# Altium PCB BRD220522.pcbdoc
Units mm, origin at the board's own origin, x right, y up, seen from the top; angles counter-clockwise.
Board outline 129.01 x 102.76 mm, 2 copper layers (Top Layer, Bottom Layer); 85 components, 54 nets, 259 pads, 128 vias.
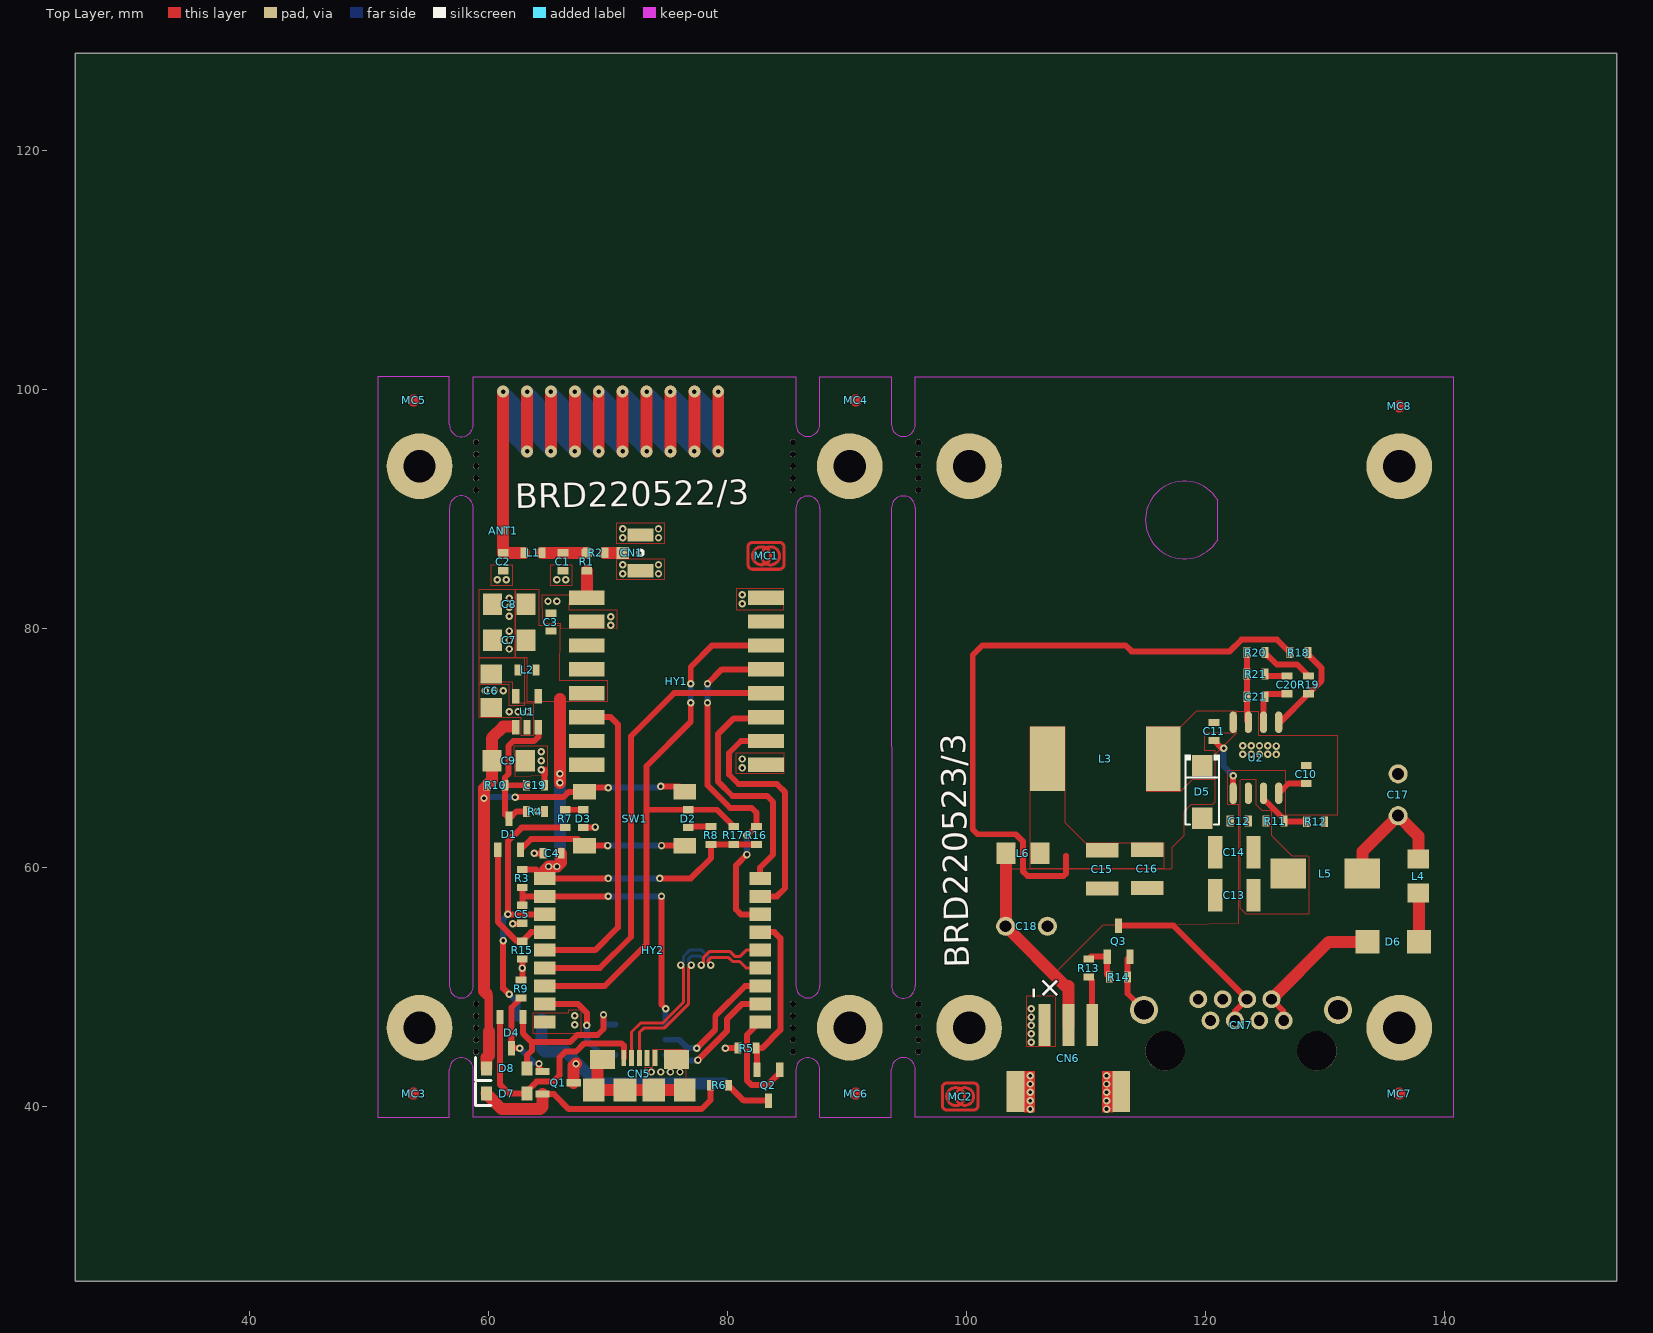
[diagram p0: Top Layer view]
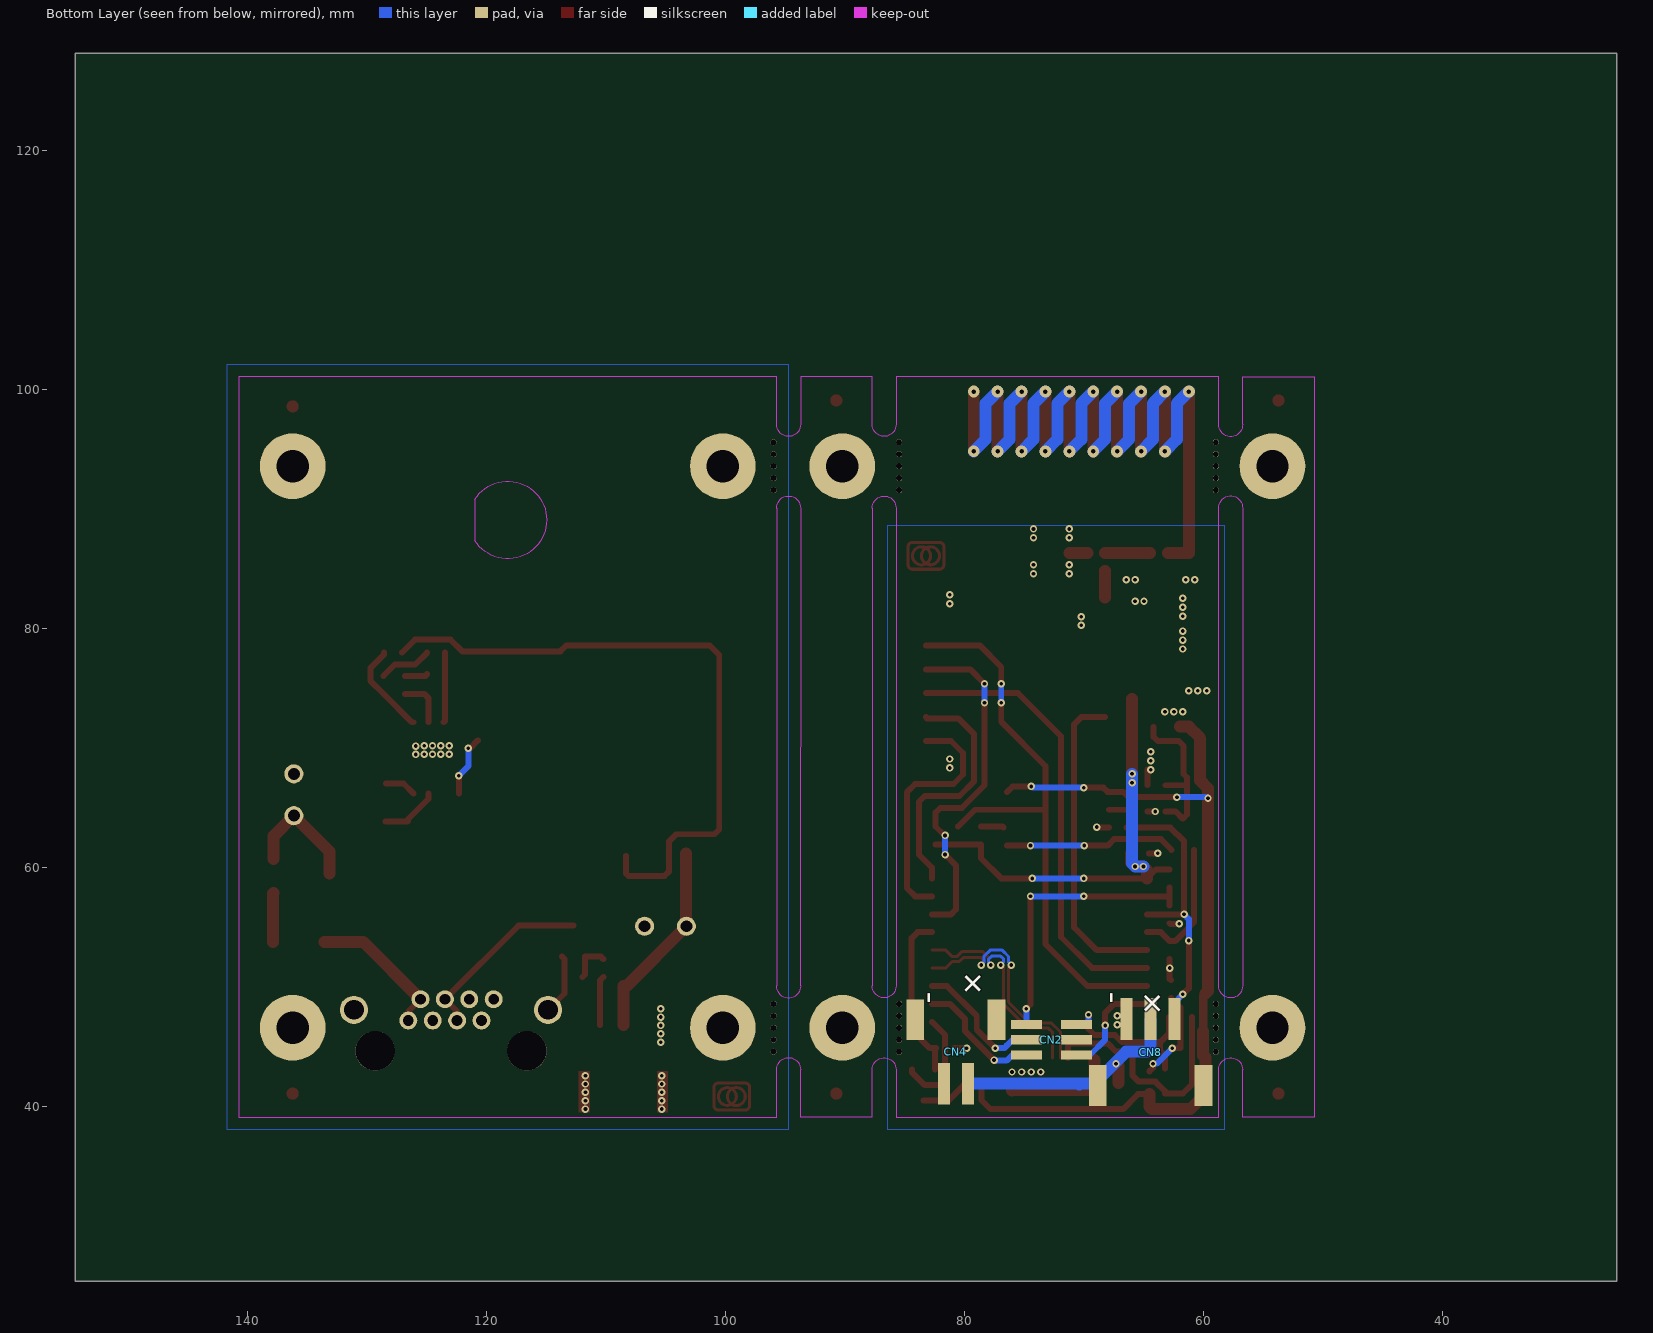
[diagram p1: Bottom Layer view, seen from below]

## Layer stack, top to bottom
Top Layer: signal copper (thickness not stored)
Dielectric: dielectric 0.32, FR-4, Dk 4.8
Bottom Layer: signal copper (thickness not stored)

## Board outline
154.414,25.4 25.4,25.4 25.4,128.164 154.414,128.164

## Components (designator, comment, footprint, x,y, rotation, side; value= is the part's Value field where it differs from the comment)
ANT1 "DN038" ANT_DN038 70.214,94.599 r0 top
C1 "100p" CA_0603 66.214,85.6 r270 top
C2 "100p" CA_0603 61.214,85.6 r270 top
C3 "100n" CA_0603 65.214,80.55 r90 top
C4 "100n" CA_0603 65.314,61.2 r180 top
C5 "100n" CA_0603 62.814,56.1 r270 top
C6 "10U/6V3" CA_1206 60.214,74.8 r270 top
C7 "10U/6V3" CA_1206 61.714,79.05 r180 top
C8 "10U/6V3" CA_1206 61.714,82.05 r180 top
C9 "10U/6V3" CA_1206 61.664,68.95 r0 top
C10 "10n" CA_0603 128.415,67.8 r90 top
C11 "100n" CA_0603 120.714,71.4 r90 top
C12 "10n" CA_0603 122.814,63.9 r180 top
C13 "10µ" CA_1210 122.414,57.7 r180 top
C14 "10µ" CA_1210 122.414,61.3 r180 top
C15 "47µ" CA_1210 111.359,59.856 r270 top
C16 "47µ" CA_1210 115.114,59.9 r270 top
C17 "100uF" CA_D8.0_P3.5 136.114,66.1 r90 top
C18 "100u" CA_D8.0_P3.5 105.014,55.1 r0 top
C19 "100n" CA_0603 63.914,66.9 r0 top
C20 "220p" CA_0603 126.814,75.3 r90 top
C21 "15p" CA_0603 124.214,74.3 r180 top
CN1 "U.FL" CN_ANT-SMD_UFL-R-SMT-1 71.964,86.351 r90 top
CN2 "20021521" CN_HDR_2X3_180D_P127_SMD 72.714,45.6 r0 bottom
CN4 "S2B-PH" CN_HDR_1X2_90D_P20_JST_S2B-PH-SM4-TB 80.714,44.6 r180 bottom
CN5 "10118192-0002LF" CN_USB_MICRO_B_AMPHENOL_10118192-0002LF 72.614,41.4 r0 top
CN6 "S3B-PH" CN_HDR_1X3_90D_P25_JST_PH_S3B#1 108.514,44.1 r0 top
CN7 "X12ADGWA3DY1027" CN_MODJACK_8C8P_RA_NO_LED 122.964,48.1 r0 top
CN8 "S3B-PH" CN_HDR_1X3_90D_P25_JST_PH_S3B#2 64.414,44.6 r0 bottom
D1 "BAT54C" SC_SOT23-3 61.714,62.8 r0 top
D2 "GREEN" DI_LED_GREEN_0603 76.714,64.1 r270 top
D3 "RED" DI_LED_RED_0603 67.914,64.1 r90 top
D4 "BAT54C" SC_SOT23-3 61.914,46.2 r180 top
D5 "SS24A" SMA_L4.4-W2.6-LS5.0-RD 119.714,66.35 r270 top
D6 "B340A" DI_DO-214AC_SMA 135.714,53.8 r180 top
D7 "B5819W" DI_SOD123W 61.514,41.1 r0 top
D8 "B5819W" DI_SOD123W 61.514,43.2 r0 top
HY1 "RFM69HCW-868S2" HY_RFM69HCW 75.714,75.601 r180 top
HY2 "ESP-C3-13U-4M" HY_WIRELM-SMD_ESP-C3-13U-2M 73.714,53.1 r0 top
L1 "L_unknown" CL_0603 63.714,86.35 r180 top
L2 "L_unknown" CL_0603 63.214,76.55 r0 top
L3 "744771118" CL_STD1212 111.614,69.1 r180 top
L4 "120E/100MHz" CL_1206 137.814,59.3 r90 top
L5 "10U" CL_STD6050 130.014,59.5 r180 top
L6 "120E/100MHz" CL_1206 104.714,61.2 r180 top
MC1 "LIEBTRAU_LOGO" MC_LIEBTRAU_LOGO 83.214,86.1 r180 top
MC2 "LIEBTRAU_LOGO" MC_LIEBTRAU_LOGO 99.464,40.85 r0 top
MC3 "MC_FIDUCIAL" MC_FIDUCIAL 53.714,41.1 r0 top
MC4 "MC_FIDUCIAL" MC_FIDUCIAL 90.714,99.1 r0 top
MC5 "MC_FIDUCIAL" MC_FIDUCIAL 53.714,99.1 r0 top
MC6 "MC_FIDUCIAL" MC_FIDUCIAL 90.714,41.1 r0 top
MC7 "MC_FIDUCIAL" MC_FIDUCIAL 136.214,41.1 r0 top
MC8 "MC_FIDUCIAL" MC_FIDUCIAL 136.214,98.6 r0 top
Q1 "SI3401A" SC_SOT23-3 65.814,42 r270 top
Q2 "NXV55UNR" SC_SOT23-3 83.414,41.8 r180 top
Q3 "BC846B" SC_SOT23-3 112.714,53.85 r0 top
R1 "0E" RE_0603 68.214,85.6 r90 top
R2 "0E" RE_0603 68.964,86.35 r0 top
R3 "10K" RE_0603 62.814,59.1 r90 top
R4 "100K" RE_0603 63.914,64.7 r180 top
R5 "3K3" RE_0603 81.614,44.9 r0 top
R6 "10K" RE_0603 79.314,41.8 r0 top
R7 "10K" RE_0603 66.414,64.1 r270 top
R8 "10K" RE_0603 78.614,62.7 r90 top
R9 "100K" RE_0603 62.714,49.85 r270 top
R10 "0E" RE_0603 60.614,66.9 r0 top
R11 "680K" RE_0603 125.814,63.9 r180 top
R12 "47K" RE_0603 129.214,63.85 r180 top
R13 "1K8" RE_0603 110.214,51.6 r270 top
R14 "10K" RE_0603 112.714,50.85 r180 top
R15 "10K" RE_0603 62.814,53.1 r270 top
R16 "10K" RE_0603 82.414,62.7 r270 top
R17 "10K" RE_0603 80.514,62.7 r270 top
R18 "10K" RE_0603 127.814,78 r180 top
R19 "1K8" RE_0603 128.614,75.3 r90 top
R20 "100E" RE_0603 124.214,78 r180 top
R21 "100K" RE_0603 124.214,76.2 r0 top
SW1 "PTS645" SW_MOM_6X6 72.215,64.1 r0 top
U1 "RT9080-33GJ5" SC_SOT23-5 63.214,73.05 r90 top
U2 "TPS54231D" SC_SO08_150MIL_BODY 124.214,69.2 r90 top
? "" ? 95.714,108.506 r0 top
? "" ? 44.308,70.1 r0 top
? "" ? 72.214,101.049 r0 top
? "" ? 50.597,70.1 r0 top
? "" ? 118.214,101.067 r0 top

## Footprints (in the part's own frame and the unit in brackets; to place one, negate y for a bottom-side part, rotate by r counter-clockwise, add the part's x,y. Pads: shape width x height; smd on the part's side, far side on the other; paste and mask are expansions set on the pad)
ANT_DN038 [mil]
  rect 10x20 smd: 1(-354.42,-252.03)
  Top Layer lines w39.37: -354.34,-226.46 -354.34,206.74 ; -275.58,9.84 -275.57,206.68 ; -196.85,9.84 -196.85,206.64 ; -118.15,9.84 -118.15,206.64 ; -39.36,9.84 -39.36,206.67 ; 39.38,9.84 39.38,206.68 ; 118.12,9.84 118.12,206.68 ; 196.85,9.84 196.86,206.67 ; 275.55,9.84 275.65,206.64 ; 354.33,9.84 354.34,206.68
  Bottom Layer lines w39.37: -354.33,206.69 -314.96,167.32 -314.96,49.21 -275.59,9.84 ; -275.57,206.68 -236.2,167.31 -236.2,49.2 -196.84,9.83 ; -196.84,206.68 -157.47,167.31 -157.47,49.2 -118.1,9.83 ; -118.11,206.68 -78.73,167.31 -78.73,49.2 -39.36,9.83 ; -39.36,206.68 0.01,167.31 0.01,49.2 39.38,9.83 ; 39.38,206.68 78.75,167.31 78.75,49.2 118.12,9.83 ; 118.12,206.68 157.49,167.31 157.49,49.2 196.86,9.83 ; 196.85,206.68 236.23,167.31 236.23,49.2 275.6,9.84 ; 275.6,206.67 314.97,167.3 314.97,49.19 354.34,9.82
CA_0603 [mm]
  rect 0.6x0.9 smd: 1(-0.75,0) 2(0.75,0)
CA_1206 [mil]
  rect 63x70.9 smd: 1(-55,0) 2(55,0)
CA_1210 [mm]
  rect 1.2x2.7 smd: 1(-1.6,0) 2(1.6,0)
CA_D8.0_P3.5 [mm]
  round 1.6 hole 1: 1(-1.75,0) 2(1.75,0)
CL_0603 [mm]
  rect 0.6x0.9 smd: 1(-0.75,0) 2(0.75,0)
CL_1206 [mil]
  rect 63x71 smd: 1(-56,0) 2(56,0)
CL_STD1212 [mm]
  rect 2.9x5.4 smd: 1(-4.85,0) 2(4.85,0)
CL_STD6050 [mm]
  rect 3x2.5 smd: 1(-3.1,0) 2(3.1,0)
CN_ANT-SMD_UFL-R-SMT-1 [mm]
  rect 1x1.05 smd: 1(0,0.75)
  rect 1.1x2.2 smd: 2(-1.5,-0.75) 2(1.5,-0.75)
  silkscreen extent -0.22,-0.97 0.22,-0.53
CN_HDR_1X2_90D_P20_JST_S2B-PH-SM4-TB [mm]
  rect 1.5x3.4 smd: 0(-3.4,2.675) 0(3.4,2.675)
  rect 1x3.5 smd: 1(1,-2.675) 2(-1,-2.675)
CN_HDR_1X3_90D_P25_JST_PH_S3B#1 [mm]
  rect 1.5x3.4 smd: 0(-4.425,-2.825) 0(4.425,-2.825)
  rect 1x3.5 smd: 1(-2,2.725) 2(0,2.725) 3(2,2.725)
CN_HDR_1X3_90D_P25_JST_PH_S3B#2 [mm]
  rect 1.5x3.4 smd: 0(-4.425,2.825) 0(4.425,2.825)
  rect 1x3.5 smd: 1(2,-2.725) 2(0,-2.725) 3(-2,-2.725)
CN_HDR_2X3_180D_P127_SMD [mm]
  rect 2.6x0.76 smd: 1(2.1,-1.27) 2(-2.1,-1.27) 3(2.1,0) 4(-2.1,0) 5(2.1,1.27) 6(-2.1,1.27)
CN_MODJACK_8C8P_RA_NO_LED [mm]
  round 1.5 hole 0.9: 1(3.57,-0.89) 2(2.55,0.89) 3(1.53,-0.89) 4(0.51,0.89) 5(-0.51,-0.89) 6(-1.53,0.89) 7(-2.55,-0.89) 8(-3.57,0.89)
  round 2.35 hole 1.65: S(-8.125,0) S(8.125,0)
  round 3.3 hole 3.3 unplated: ""(-6.35,-3.43) ""(6.35,-3.43)
CN_USB_MICRO_B_AMPHENOL_10118192-0002LF [mm]
  rect 0.4x1.35 smd: 1(-1.3,2.68) 2(-0.65,2.68) 3(0.002,2.679) 4(0.65,2.68) 5(1.3,2.68)
  rect 1.8x1.9 smd: S(-3.8,0) S(3.8,0)
  rect 2.1x1.6 smd: S(-3.1,2.55) S(3.1,2.55)
  rect 1.9x1.9 smd: S(-1.2,0) S(1.2,0)
DI_DO-214AC_SMA [mm]
  rect 2x2 smd: 1(-2.15,0) 2(2.15,0)
DI_LED_GREEN_0603 [mm]
  rect 0.6x0.9 smd: 1(-0.75,0) 2(0.75,0)
DI_LED_RED_0603 [mm]
  rect 0.6x0.9 smd: 1(-0.75,0) 2(0.75,0)
DI_SOD123W [mm]
  rect 0.9x1.2 smd: 1(-1.7,0) 2(1.7,0)
  silkscreen extent -2.6,-1 -1.3,0.9
HY_RFM69HCW [mm]
  rect 3x1.2 smd: 1(-7.5,7) 2(-7.5,5) 3(-7.5,3) 4(-7.5,1) 5(-7.5,-1) 6(-7.5,-3) 7(-7.5,-5) 8(-7.5,-7) 9(7.5,-7) 10(7.5,-5) 11(7.5,-3) 12(7.5,-1) 13(7.5,1) 14(7.5,3) 15(7.5,5) 16(7.5,7)
HY_WIRELM-SMD_ESP-C3-13U-2M [mm]
  rect 1.8x1.1 smd: 1(-9,6) 2(-9,4.5) 3(-9,3) 4(-9,1.5) 5(-9,0) 6(-9,-1.5) 7(-9,-3) 8(-9,-4.5) 9(-9,-6) 10(9,-6) 11(9,-4.5) 12(9,-3) 13(9,-1.5) 14(9,0) 15(9,1.5) 16(9,3) 17(9,4.5) 18(9,6)
MC_FIDUCIAL [mm]
  Top Layer lines w0.5: -0.254,0 cw(c0,0) 0.254,0 cw(c0,0) -0.254,0
MC_LIEBTRAU_LOGO [mm]
  Top Layer lines w0.254: 1.5,0.75 ccw(c1.127,0.751) 1.125,1.125 -1.125,1.125 ccw(c-1.125,0.75) -1.5,0.75 -1.5,-0.75 ccw(c-1.125,-0.75) -1.125,-1.125 1.125,-1.125 ccw(c1.125,-0.75) 1.5,-0.75 1.5,0.75 ; 1.125,0 ccw(c0.375,0) -0.375,0 ccw(c0.375,0) 1.125,0 ; 0.375,0 ccw(c-0.375,0.004) -1.125,0 ccw(c-0.375,-0.004) 0.375,0
RE_0603 [mm]
  rect 0.6x0.9 smd: 1(-0.75,0) 2(0.75,0)
SC_SO08_150MIL_BODY [mm]
  oval 1.8x0.6 smd: 1(-2.972,1.905) 2(-2.972,0.635) 3(-2.972,-0.635) 4(-2.972,-1.905) 5(2.972,-1.905) 6(2.972,-0.635) 7(2.972,0.635) 8(2.972,1.905)
SC_SOT23-3 [mm]
  rect 0.6x1.2 smd: 1(-0.95,-1.3) 2(0.95,-1.3) 3(0,1.3)
SC_SOT23-5 [mil]
  rect 47.2x23.6 smd: 1(-51,37) 2(-51,0) 3(-51,-37) 4(51,-37) 5(51,37)
SMA_L4.4-W2.6-LS5.0-RD [mm]
  rect 1.8x1.7 smd: 1(-2.192,0) 2(2.192,0)
  silkscreen extent -3.11,-1.48 2.73,1.48
SW_MOM_6X6 [mm]
  rect 1.9x1.3 smd: 1(-4.2,2.25) 2(4.2,2.25) 3(-4.2,-2.25) 4(4.2,-2.25)
? [mm]

## Free pads (board coordinates)
  round 5.5 hole 2.7: 1(54.214,46.6) 1(54.214,93.6) 1(90.214,46.6) 1(90.214,93.6) 1(100.214,93.6) 1(100.214,46.6) 1(136.214,93.6) 1(136.214,46.6)
  round 0.5 hole 0.5 unplated: ""(58.963,91.6) ""(58.963,92.6) ""(58.963,93.6) ""(58.963,94.6) ""(58.963,95.6) ""(58.964,44.601) ""(58.964,45.601) ""(58.964,46.601) ""(58.964,47.601) ""(58.964,48.601) ""(85.464,44.602) ""(85.464,45.602) ""(85.464,46.602) ""(85.464,47.602) ""(85.464,48.602) ""(85.464,91.6) ""(85.464,92.6) ""(85.464,93.6) ""(85.464,94.6) ""(85.464,95.6) ""(95.964,44.6) ""(95.964,45.6) ""(95.964,46.6) ""(95.964,47.6) ""(95.964,48.6) ""(95.964,91.6) ""(95.964,92.6) ""(95.964,93.6) ""(95.964,94.6) ""(95.964,95.6)

## Via types
v1: diameter 0.62, hole 0.31, Top Layer to Bottom Layer, tented both sides, 109 vias
v2: diameter 1, hole 0.38, Top Layer to Bottom Layer, tented both sides, 19 vias

## Nets (pads, with @x,y where several pads share a name; then routed paths per layer and width w, separated by ;. In a path a pad name is that pad's centre, name@x,y a point inside that pad or via, vN(x,y) a via of type N, cw(c..) or ccw(c..) an arc to the next point about the centre after c; other vN are vias at no path point)
+3V3: C3.1 C4.1 C7.1 C8.1 HY1.13 HY2.1 L2.2 R3.2 R8.1 R16.2 R17.2 | length 40.2
  Top Layer w0.5: R3.2 63.964,59.85 HY2.1 66.214,59.1 v1(70.014,59.1) ; v1(74.314,59.1) 76.915,59.101 78.614,60.8 R8.1 ; R8.1@78.765,61.951 R17.2 ; R17.2 R16.2
  Top Layer w1: HY2.1 64.714,59.8 v1(65.014,60.1) v1(65.714,60.1) 66.064,60.45 C4.1 ; v1(65.964,67.1) v1(65.964,67.85) 65.964,74.1
  Bottom Layer w0.5: v1(70.014,59.1) v1(74.314,59.1)
  Bottom Layer w1: v1(65.014,60.1) v1(65.714,60.1) 65.964,60.35 v1(65.964,67.85)
+5V: C18.1 CN6.2 L6.2 | length 16.7
  Top Layer w1: L6.2 103.292,55.127 C18.1 108.265,50.099 108.514,50.099 CN6.2
/CS: HY1.5 HY2.16 R16.1 | length 29.9
  Top Layer w0.5: v1(78.314,75.4) 79.515,76.601 HY1.5@83.214,76.601 ; v1@78.316,73.8 78.316,66.899 80.216,64.999 82.014,64.999 82.415,64.6 R16.1 ; v1(81.614,61.1) 80.714,60.2 80.714,56.5 81.114,56.1 HY2.16 ; v1(81.614,62.7) 81.664,62.7 R16.1
  Bottom Layer w0.5: v1(78.314,73.8) v1(78.314,75.4) ; v1(81.614,61.1) v1(81.614,62.7)
ADC: HY2.15 Q2.2 R5.2 | length 14.1
  Top Layer w0.5: Q2.2 82.465,44.8 R5.2 82.885,44.9 84.414,46.429 84.414,54.1 83.916,54.6 HY2.15
ANT1_1: ANT1.1 C2.1 L1.2 | length 15.2
  Top Layer w1: 61.214,99.85 C2.1 L1.2
C1_1: C1.1 L1.1 R1.2 R2.1 | length 3.8
  Top Layer w1: L1.1 R1.2
C11_1: C11.1 U2.1 | length 5.2
  Top Layer w0.5: C11.1 121.364,70 v1(121.514,70) ; U2.1 122.309,67.695 v1(122.314,67.7)
  Bottom Layer w0.5: v1(121.514,70) 121.514,68.5 v1(122.314,67.7)
C20_1: C20.1 C21.1 U2.6 | length 4.1
  Top Layer w0.5: U2.6 124.849,74.185 C21.1 125.214,74.55 C20.1
CN2_2: CN2.2 D4.1 D8.2 | length 14.2
  Top Layer w0.5: D4.1 62.864,46.15 63.614,45.4 ; D8.2 63.215,44.3 63.614,44.699 63.614,45.4 ; v1(69.614,47.7) 69.614,46.501 69.113,46 67.414,46 66.815,45.4 63.614,45.4
  Bottom Layer w0.5: v1@69.614,47.699 69.614,47 69.746,46.871 CN2.2
CN6_3: CN6.3 R13.2 | length 4.1
  Top Layer w0.5: R13.2@110.215,50.85 110.514,50.55 CN6.3
CN7_1: CN7.1 CN7.2 D6.2 | length 12.2
  Top Layer w0.5: CN7.2 126.534,47.97 CN7.1
  Top Layer w1: CN7.2 130.324,53.8 D6.2
D1_2: D1.2 SW1.3 SW1.4 | length 14.4
  Top Layer w0.5: D1.2@62.664,61.5 63.565,62.4 67.465,62.4 SW1.3 v1(69.964,61.85) ; v1(74.465,61.85) SW1.4
  Bottom Layer w0.5: v1(69.964,61.85) v1(74.465,61.85)
D1_3: C19.1 D1.3 R4.2 R10.2 U1.3 | length 13.5
  Top Layer w0.5: R4.2 62.314,64.7 D1.3 61.365,64.45 R10.2 ; C19.1 R10.2 ; U1.3 64.154,70.939 63.815,70.6 62.065,70.6 61.663,70.198 61.663,67.849 61.365,67.55 R10.2@61.365,66.9
D2_2: D2.2 R8.2 | length 1.9
  Top Layer w0.5: D2.2 76.815,63.45 R8.2
D3_2: D3.2 R7.1 | length 1.5
  Top Layer w0.5: R7.1 D3.2
DIO0: HY1.14 HY2.5 | length 26.7
  Top Layer w0.5: HY2.5@64.714,53.099 68.915,53.099 70.815,54.999 70.815,71.999 70.214,72.601 HY1.14
EN_PWR: D1.1 HY2.4 R15.1 | length 11
  Top Layer w0.5: D1.1@60.764,61.499 60.764,55.451 62.364,53.851 R15.1 63.564,54.6 HY2.4
GND: C1.2 C2.2 C3.2 C4.2 C5.2 C6.2 C7.2 C8.2 C9.2 C10.2 C12.2 C13.2 C14.2 C15.2 C16.2 C17.2 C18.2 C19.2 C21.2 CN1.2 CN2.4 CN4.0 CN4.2 CN5.5 CN5.S CN6.0 CN6.1 CN7.3 CN7.6 CN7.S CN8.1 D3.1 D5.2 HY1.1 HY1.8 HY1.10 HY2.9 pad.1 Q3.2 R4.1 R5.1 R9.1 R12.1 R14.1 R15.2 R20.2 R21.1 U1.2 U2.7 | length 28.6
  Top Layer w0.5: v1(62.014,55.3) 62.765,55.3 C5.2 ; R9.1 62.815,50.7 v1(62.815,51.6) R15.2 ; v1(63.815,61.2) C4.2 ; v1(64.014,64.7) R4.1 ; v1(64.415,68.2) 64.663,68.199 C19.2@64.663,66.899 ; D3.1 68.864,63.35 v1(68.914,63.4) ; v1(79.815,44.9) R5.1 ; Q3.2 113.464,52.35 R14.1 113.464,49.475 CN7.S@114.839,48.1 ; R20.2 123.464,72.287 U2.7
  Top Layer w1: CN5.S@69.114,43.9 69.114,41.4 68.815,41.4 75.964,41.4 CN5.S@76.014,41.35
  other v1: 105.314,39.8 111.714,39.8 105.314,40.5 111.714,40.5 105.314,41.2 111.714,41.2 105.314,41.9 111.714,41.9 105.314,42.6 111.714,42.6 73.614,42.9 74.414,42.9 75.215,42.9 76.014,42.9 105.414,45.4 105.414,46.1 105.414,46.8 67.215,46.85 105.414,47.5 67.215,47.6 105.414,48.2 81.215,68.35 64.415,68.95 81.215,69.1 125.902,69.479 123.114,69.5 123.814,69.5 124.514,69.5 125.214,69.5 64.415,69.7 125.902,70.179 123.114,70.2 123.814,70.2 124.514,70.2 125.214,70.2 61.714,73.05 62.465,73.05 63.215,73.05 59.714,74.8 60.465,74.8 61.214,74.8 61.714,78.3 61.714,79.05 61.714,79.8 70.214,80.3 70.214,81 61.714,81.05 61.714,81.8 81.215,82.1 64.964,82.3 65.714,82.3 61.714,82.55 81.215,82.85 60.714,84.1 61.465,84.1 65.714,84.1 66.465,84.1 71.214,84.6 74.215,84.6 71.214,85.35 74.215,85.35 71.214,87.6 74.215,87.6 71.214,88.35 74.215,88.35
HY1_9: HY1.9 R1.1 | length 2.2
  Top Layer w1: HY1.9 R1.1
HY2_3: CN8.3 HY2.3 R7.2 | length 23.9
  Top Layer w0.5: v1(61.214,53.9) 61.214,49.9 v1(61.714,49.4) ; HY2.3@64.714,56.099 61.616,56.099 v1(61.614,56.1) 61.614,62.2 62.764,63.35 R7.2
  Bottom Layer w0.5: v1(61.214,53.9) 61.214,55.7 v1(61.614,56.1) ; v1(61.714,49.4) 62.414,48.7 CN8.3
HY2_10: HY2.10 Q2.1 | length 9
  Top Layer w0.5: HY2.10 81.614,46 81.614,42.2 82.014,41.8 83.314,41.8 84.364,42.85 Q2.1
IO9: CN2.6 HY2.8 | length 9
  Top Layer w0.5: HY2.8 67.465,48.6 68.215,47.85 v1(68.215,46.8)
  Bottom Layer w0.5: v1(68.215,46.8) 68.215,45.6 69.485,44.33 CN2.6
L2_1: C6.1 L2.1 U1.5
L4_1: D6.1 L4.1 | length 4.1
  Top Layer w1: L4.1 137.864,57.827 D6.1
L4_2: C17.1 L4.2 L5.1 | length 10.4
  Top Layer w1: L5.1 133.114,61.35 C17.1 137.814,62.65 L4.2
L6_1: C15.1 C16.1 L3.2 L6.1 R18.2 | length 55
  Top Layer w0.5: 104.714,61.199 104.714,62.2 104.114,62.799 100.917,62.799 100.515,63.201 100.515,77.8 101.315,78.6 113.314,78.6 113.814,78.1 122.014,78.1 123.014,79.1 125.964,79.1 R18.2 ; 104.714,61.2 104.714,59.7 105.114,59.3 108.114,59.3 108.314,59.5 108.314,61
MISO: HY1.2 HY2.17 | length 21
  Top Layer w0.5: HY2.17 84.114,57.6 84.814,58.3 84.814,66.3 84.114,67 80.914,67 80.114,67.8 80.114,69.6 81.115,70.601 HY1.2@83.214,70.601
MOSI: HY1.3 HY2.18 | length 20.7
  Top Layer w0.5: HY2.18 82.715,60 83.815,61.1 83.815,65.499 83.314,66 80.414,66 79.215,67.201 79.215,71.199 80.515,72.499 83.113,72.499 HY1.3@83.214,72.601
NULL: 
Q1_1: D4.3 Q1.1 R9.2 | length 8.1
  Top Layer w0.5: v1(62.614,44.9) D4.3 61.914,48.3 R9.2 ; v1(64.215,43.6) 64.215,43.25 Q1.1
  Bottom Layer w0.5: v1(62.614,44.9) 63.915,43.6 v1(64.215,43.6)
Q2_3: Q2.3 R6.2 | length 3.9
  Top Layer w0.5: R6.2 81.364,40.5 Q2.3
Q3_1: Q3.1 R13.1 R14.2 | length 3.4
  Top Layer w0.5: R13.1@110.214,52.35 110.414,52.55 Q3.1 111.764,51.05 R14.2
Q3_3: CN7.4 CN7.5 Q3.3 | length 15.5
  Top Layer w0.5: Q3.3 117.314,55.15 CN7.4 122.454,47.97 CN7.5
R2_2: CN1.1 R2.2 | length 1.5
  Top Layer w1: R2.2 CN1.1
R11_1: R11.1 R12.2 U2.3 | length 5
  Top Layer w0.5: U2.3 124.849,65.765 126.564,64.05 R11.1 126.614,63.85 R12.2@128.464,63.85
R18_1: R18.1 R19.1 U2.5 | length 7.9
  Top Layer w0.5: U2.5 126.236,72.172 R19.1 129.714,75.65 129.714,76.7 128.564,77.85 R18.1
R20_1: R19.2 R20.1 | length 4.5
  Top Layer w0.5: R20.1 125.964,77 127.664,77 R19.2
R21_2: C20.2 R21.2 | length 1.9
  Top Layer w0.5: R21.2 125.114,76.05 C20.2
RST: C5.1 CN2.1 HY2.2 R3.1 | length 24
  Top Layer w0.5: C5.1 R3.1 ; 62.815,57.6 HY2.2 v1(70.014,57.6) ; v1(74.465,57.6) 74.465,48.55 v1(74.815,48.2)
  Bottom Layer w0.5: v1(70.014,57.6) v1(74.465,57.6) ; CN2.1 v1(74.815,48.2)
RST_RADIO: D2.1 HY1.6 HY2.7 R17.1 | length 49.6
  Top Layer w0.5: HY2.7 69.715,50.099 73.215,53.599 73.215,68.502 76.914,72.2 v1(76.914,73.8) ; 73.215,64.829 D2.1@76.715,64.849 ; D2.1 79.114,64.85 R17.1 ; v1(76.914,75.4) 76.914,76.8 78.714,78.601 HY1.6@83.215,78.601
  Bottom Layer w0.5: v1(76.914,73.8) v1(76.914,75.4)
RXD: CN2.5 HY2.11 | length 10.7
  Top Layer w0.5: v1@77.516,43.899 79.964,46.35 79.964,47.351 81.214,48.601 HY2.11
  Bottom Layer w0.5: CN2.5 75.985,44.33 76.464,43.85 77.464,43.85 v1(77.515,43.9)
S$33489: 
S$94106: 
S$94396: 
SCK: HY1.4 HY2.6 | length 37.9
  Top Layer w0.5: HY2.6 69.314,51.6 71.915,54.199 71.915,71.001 75.517,74.6 HY1.4@83.215,74.6
SW: C11.2 D5.1 L3.1 U2.8
TXD: CN2.3 HY2.12 | length 11
  Top Layer w0.5: v1(77.414,44.9) 78.964,46.45 78.964,47.6 81.464,50.1 HY2.12
  Bottom Layer w0.5: CN2.3 75.965,45.6 76.464,45.1 76.664,44.9 v1(77.414,44.9)
U2_4: C10.1 U2.4 | length 2.6
  Top Layer w0.5: U2.4 126.941,67.05 C10.1
USB_D+: CN5.3 HY2.14 | length 19.3
  Top Layer w0.254: CN5.3 72.616,46.202 73.015,46.6 74.737,46.599 76.715,48.578 76.715,51.6 v1(76.964,51.85) ; v1(77.787,51.85) 77.965,52.027 77.965,52.474 78.466,52.974 80.216,52.974 80.637,52.553 81.013,52.553 81.559,53.099 HY2.14@82.715,53.099
  Bottom Layer w0.254: v1(76.964,51.85) 76.715,52.1 76.715,52.35 76.964,52.6 77.715,52.6 77.964,52.35 77.964,52.028 v1(77.787,51.85)
USB_D-: CN5.2 HY2.13 | length 20.2
  Top Layer w0.254: CN5.2@71.965,44.08 71.965,46.25 72.72,47.006 74.568,47.006 76.308,48.746 76.308,51.631 v1(76.089,51.85) ; v1(78.589,51.85) 78.372,52.068 78.372,52.257 78.589,52.475 80.089,52.475 80.418,52.146 81.013,52.146 81.559,51.6 HY2.13
  Bottom Layer w0.254: v1(76.089,51.85) 76.308,52.069 76.308,52.569 76.84,53.1 77.839,53.1 78.37,52.569 78.37,52.069 v1(78.589,51.85)
VBAT: CN4.1 CN8.0 CN8.2 Q1.3 | length 20.7
  Top Layer w1: Q1.3 67.115,43.4 v1(67.314,43.6)
  Bottom Layer w1: CN8.2 64.415,44.9 64.714,44.6 66.464,44.6 69.139,41.925 70.388,41.925 ; 70.388,41.849 70.388,41.925 ; CN4.1 70.388,41.925
VCC: C9.1 D7.1 D8.1 Q1.2 R6.1 R10.1 SW1.1 SW1.2 U1.1 | length 70.3
  Top Layer w0.5: v1(62.214,65.9) 66.265,65.9 66.715,66.35 SW1.1 ; Q1.2 65.465,41.05 66.715,39.8 77.815,39.8 78.565,40.549 R6.1 ; SW1.1 68.364,66.7 v1(70.014,66.7) ; v1(74.414,66.8) 75.964,66.8 SW1.2
  Top Layer w0.7: 59.614,49.69 60.014,49.289 60.014,46.3
  Top Layer w1: D7.1 61.114,39.8 64.315,39.8 64.514,40 Q1.2 ; D8.1 59.814,44.1 60.014,44.3 60.014,46.3 ; 59.815,49.489 59.614,49.69 59.614,66.65 60.266,67.292 C9.1@60.266,68.949 ; C9.1 60.267,70.804 ; 60.317,70.904 61.214,71.801 61.966,71.801
  Bottom Layer w0.5: v1(59.614,65.8) 59.714,65.9 v1(62.214,65.9) ; v1(70.014,66.7) 74.314,66.7 v1(74.414,66.8)
VIN: C12.1 C13.1 C14.1 L5.2 R11.2 U2.2
VUSB: CN5.1 D4.2 D7.2 | length 20.1
  Top Layer w0.5: D4.2 60.965,41.85 61.714,41.1 D7.2 ; D7.2 63.215,41.301 64.015,42.101 65.415,42.101 65.915,42.601 65.915,44.1 66.416,44.6 67.315,44.6 68.015,45.3 71.114,45.3 71.314,45.1 CN5.1
pads on no net: CN5.4 CN7. CN7.7 CN7.8 HY1.7 HY1.11 HY1.12 HY1.15 HY1.16 U1.4
copper on no net:
  other v2: 63.215,94.849 65.215,94.849 67.215,94.849 69.215,94.849 71.215,94.849 73.215,94.849 75.215,94.849 77.215,94.849 79.215,94.849 61.215,99.849 63.215,99.849 65.215,99.849 67.215,99.849 69.215,99.849 71.215,99.849 73.215,99.849 75.215,99.849 77.215,99.849 79.215,99.849

## Polygon pours and split planes (outlines as drawn)
GND on Bottom Layer (solid): 58.214,88.6 86.464,88.6 86.464,38.1 58.214,38.1
GND on Bottom Layer (solid): 94.714,102.1 141.714,102.1 141.714,38.1 94.714,38.1
GND on Top Layer (solid): 80.714,69.6 84.714,69.6 84.714,67.85 80.714,67.85
GND on Top Layer (solid): 80.714,83.35 80.714,81.6 84.714,81.6 84.714,83.35 80.714,83.35
GND on Top Layer (solid): 66.739,82.85 66.714,81.6 70.714,81.6 70.739,79.95 66.014,80 66.014,80.4 64.514,80.4 64.489,82.85
GND on Top Layer (solid): 76.514,44.8 76.514,41.6 73.114,41.876 73.114,41.8 73.114,41.876 73.114,43.3 73.714,43.3 73.714,44.8 76.514,44.8
GND on Top Layer (solid): 62.164,70.2 64.914,70.2 64.914,67.7 62.214,67.6 62.164,70.2
GND on Top Layer (solid): 59.214,75.55 61.964,75.55 61.964,73.8 63.714,73.8 63.714,71.05 62.714,71.05 62.714,72.55 59.214,72.55 59.214,75.05
L2_1 on Top Layer (solid): 59.214,77.55 62.964,77.55 62.964,73.55 61.714,73.55 61.714,75.3 59.214,75.3
+3V3 on Top Layer (solid): 62.214,83.3 64.214,83.3 64.214,80.3 65.964,80.3 65.914,75.7 69.914,75.7 69.914,73.9 63.214,73.9 63.214,77.55 62.214,77.55
GND on Top Layer (solid): 59.214,83.3 62.214,83.3 62.214,77.55 59.214,77.55
GND on Top Layer (solid): 60.214,85.35 61.964,85.35 61.964,83.6 60.214,83.6
GND on Top Layer (solid): 65.214,85.35 66.964,85.35 66.964,83.6 65.214,83.6
GND on Top Layer (solid): 70.714,85.85 74.714,85.85 74.714,84.1 70.714,84.1
GND on Top Layer (solid): 70.714,88.85 74.714,88.85 74.714,87.1 70.714,87.1
GND on Top Layer (solid): 63.714,47.85 66.714,47.85 66.714,48.1 67.714,48.1 67.714,46.1 63.714,46.1
GND on Top Layer (solid): 105.014,49.3 107.414,49.3 107.414,45 105.014,45
SW on Top Layer (solid): 122.614,73.1 119.214,73.1 117.914,71.8 115.014,71.8 115.014,66.4 117.914,66.4 118.914,67.4 120.814,67.4 120.814,69.8 119.914,69.8 119.914,71.2 119.814,71.3 122.614,71.3
GND on Top Layer (solid): 122.614,73.1 124.414,73.1 124.414,71.1 131.014,71.1 131.014,64.4 126.714,64.4 126.714,68.1 121.814,68.1 121.814,65.3 122.714,65.3 122.714,55.3 115.314,55.2 111.414,55.2 107.214,51 103.214,55.1 103.214,59.9 107.414,59.9 110.014,59.9 117.114,59.9 117.214,60 117.214,61.7 118.214,62.7 118.214,64.7 118.814,65.3 120.614,65.3 120.814,65.5 120.814,69.5 122.614,71.3
L6_1 on Top Layer (solid): 107.414,59.9 105.314,59.9 105.314,71.8 108.214,71.8 108.214,63.8 109.914,62.1 116.514,62.1 116.514,59.9 107.414,59.9
VIN on Top Layer (solid): 123.014,67.4 124.214,67.4 124.214,65.3 124.714,64.8 125.514,64.8 125.514,62.7 127.214,61 128.514,61 128.614,60.9 128.614,56.1 123.414,56.1 123.314,56.2 122.914,56.6 122.914,67.3

## Keep-outs
Keep-Out Layer:
  lines w0.1: 120.965,87.368 cw(c118.214,89.1) 120.965,90.832
  lines w0.1 net S$33489: 56.715,90.096 cw(c57.715,90.117) 58.714,90.096 ; 56.715,97.1 ccw(c57.715,97.079) 58.714,97.1 ; 56.715,43.096 cw(c57.715,43.101) 58.715,43.096 ; 56.715,50.1 ccw(c57.715,50.095) 58.715,50.1 ; 85.714,43.098 cw(c86.714,43.098) 87.715,43.098 ; 85.714,50.102 ccw(c86.714,50.102) 87.715,50.102 ; 85.715,90.096 cw(c86.714,90.105) 87.714,90.096 ; 85.715,97.1 ccw(c86.714,97.091) 87.714,97.1 ; 93.714,43.1 cw(c94.714,43.11) 95.714,43.1 ; 93.714,50.1 ccw(c94.714,50.09) 95.714,50.1 ; 93.714,90.099 cw(c94.714,90.108) 95.714,90.099 ; 93.714,97.103 ccw(c94.714,97.094) 95.714,97.103

## Other copper
Top Layer:
  rectangle net GND: 104.814,39.5 105.714,43
  rectangle net GND: 111.314,39.5 112.314,43

## Silkscreen, mask and mechanical layers (free items; w line width, h text height)
Top Overlay:
  text "BRD220522/3" at 62.232,90.084 h2.03 r1
  text "BRD220523/3" at 100.23,51.618 h2.03 r91
  text "+" at 108.433,49.718 h2.03 r135
  text "-" at 106.43,49 h2.03 r90
Bottom Overlay:
  text "-" at 68.481,49.6 h2.03 r90
  text "-" at 83.73,49.6 h2.03 r90
  text "+" at 65.683,48.881 h2.03 r45
  text "+" at 79.496,48.881 h2.03 r315
Bottom Solder:
  rectangle: 121.014,86 123.014,92.5
  circle w7 net S$94396: c118.214,89.1 r6.8
Document:
  circle w0.1: c118.214,89.1 r10.5
  circle w1: c54.215,93.6 r3.5
  circle w1: c90.215,93.6 r3.5
  circle w1: c100.215,93.6 r3.5
  circle w1: c136.214,93.6 r3.5
  circle w1: c136.214,46.6 r3.5
  circle w1: c100.215,46.6 r3.5
  circle w1: c90.215,46.6 r3.5
  circle w1: c54.215,46.6 r3.5
  text "Board / cutout" at 116.014,89.2 h1